# Altium PCB F1956.PcbDoc
Units mm, origin at the board's own origin, x right, y up, seen from the top; angles counter-clockwise.
Board outline 24.13 x 27.56 mm, 2 copper layers (Top Layer, Bottom Layer), stack 1.27 mm thick; 6 components, 7 nets, 53 pads, 13 vias.
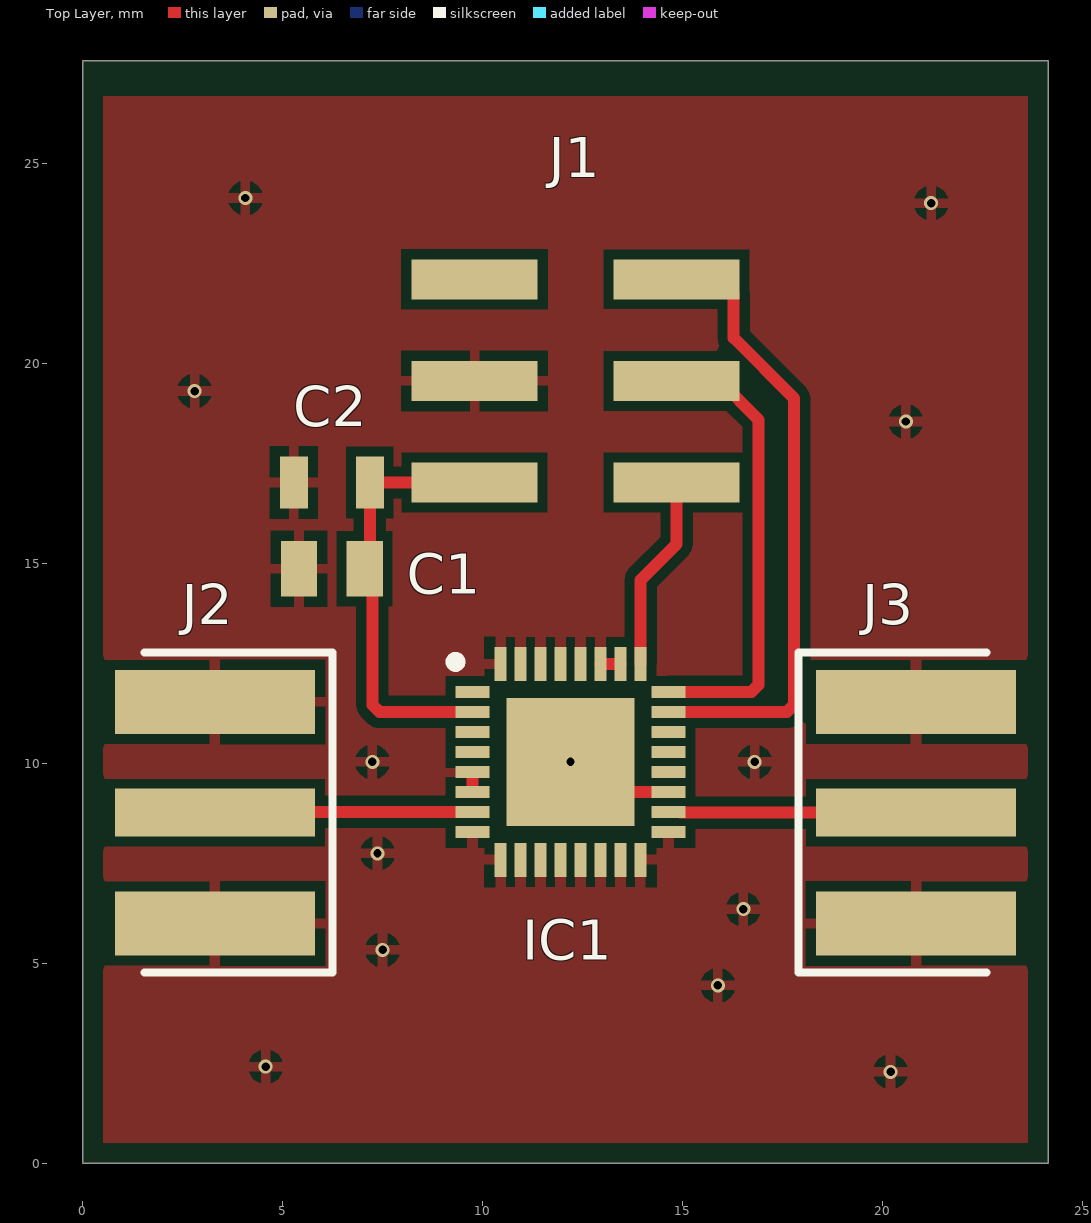
[diagram p0: Top Layer view]
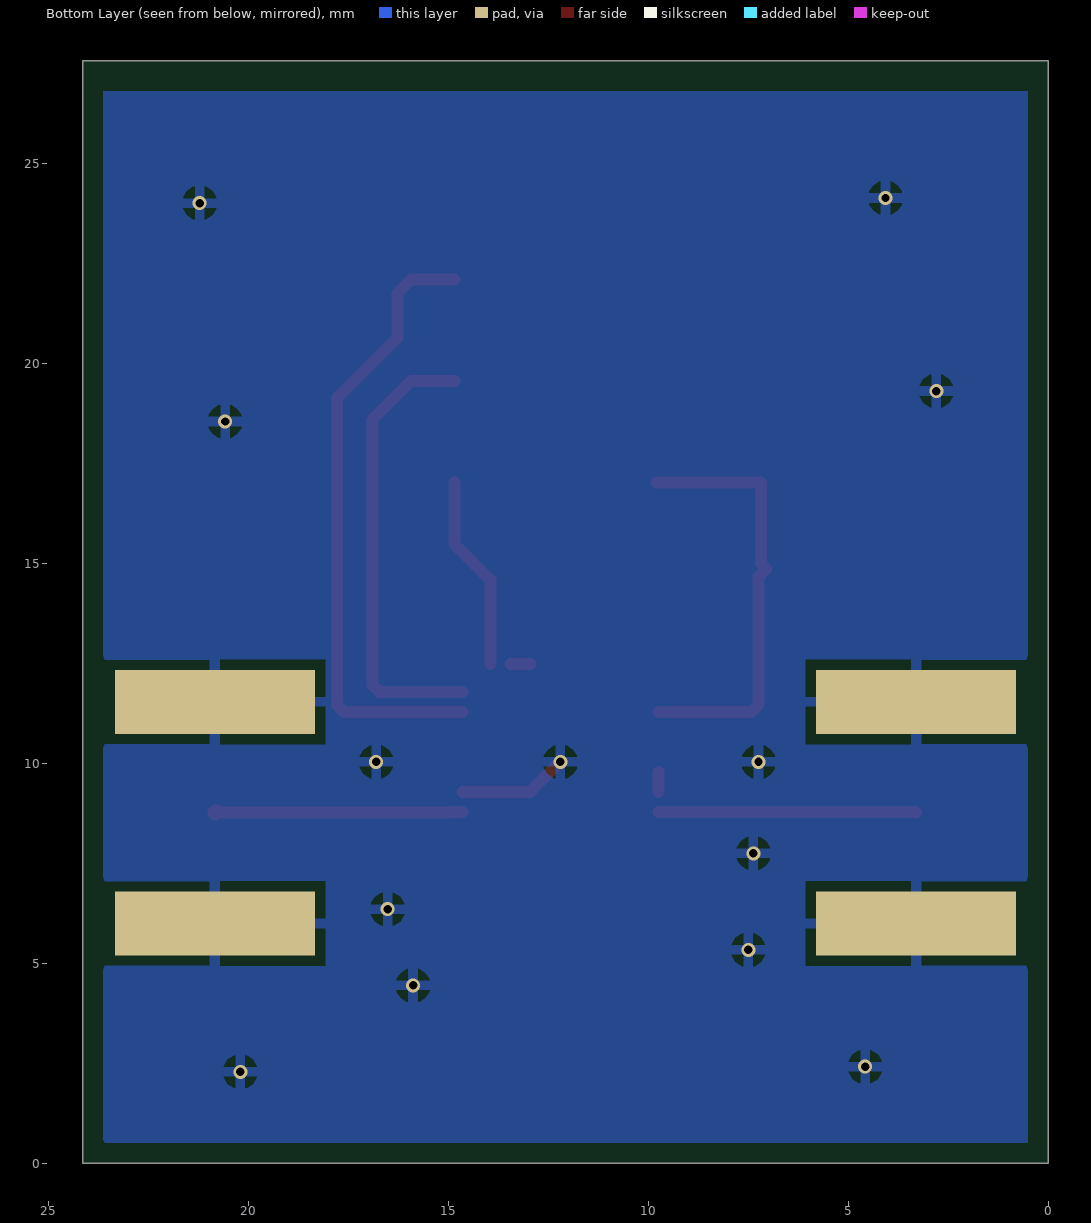
[diagram p1: Bottom Layer view, seen from below]

## Layer stack, top to bottom
Top Solder: solder mask 0.0152, Solder Resist, Dk 3.5
Top Layer: signal copper 0.035
Dielectric 1: dielectric 1.2, FR-4, Dk 4.8
Bottom Layer: signal copper 0.035
Bottom Solder: solder mask 0.0152, Solder Resist, Dk 3.5

## Board outline
0,0 24.13,0 24.13,27.559 0,27.559

## Design rules (kind name [scope] priority, off if disabled: settings)
Clearance [All] p1: gap=0.254 ignorepadtopadclearanceinfootprint=FALSE except(0: Arc-Hole Track-Hole SMDPad-Hole THPad-Hole Via-Hole Fill-Hole Poly-Hole Region-Hole Text-Hole; 0.15: Arc-Arc Arc-Track Arc-SMDPad Track-Track Track-SMDPad SMDPad-SMDPad; 0.5: THPad-THPad)
MinimumSolderMaskSliver [All] p1: minsoldermaskwidth=0.1
PolygonConnect [All] p1: connectstyle=Relief reliefconductorwidth=0.254 reliefentries=4 polygonreliefangle="90 Angle" airgapwidth=0.254
RoutingLayers [All] p1: top layer_v5=TRUE bottom layer_v5=FALSE
RoutingVias [All] p1: holewidth=0.15 width=0.25 viastyle="Through Hole" minholewidth=0.15 minwidth=0.25 maxholewidth=0.2 maxwidth=0.3
SolderMaskExpansion [All] p1: expansion=0.102 istentingtop=FALSE
Width [All] p1: maxlimit=0.9 minlimit=0.15 preferedwidth=0.254 minimp=50.000000 maximp=50.000000 favimp=50.000000
28 further rules are at their usual default settings.

## Classes and differential pairs
component class "PA Attenuator": C1 C2 J2

## Components (designator, comment, footprint, x,y, rotation, side; value= is the part's Value field where it differs from the comment)
C1 "GJ821BR71H105KA12K" CAPC2012X135N 6.223,14.859 r0 top
C2 "GRM21A5C2E102FWA1J" FP-GRM21A-0_2-MFG 6.223,17.018 r0 top
IC1 "F1956NBGI8" QFN50P500X500X80-33N-D 12.192,10.033 r0 top
J1 "M20-8760342R" M208760342R 12.319,19.558 r90 top
J2 "CON-SMA-EDGE-S" FP-CON-SMA-EDGE-S-MFG -3.958,8.763 r90 top
J3 "CON-SMA-EDGE-S" FP-CON-SMA-EDGE-S-MFG 28.088,8.763 r270 top

## Footprints (in the part's own frame and the unit in brackets; to place one, negate y for a bottom-side part, rotate by r counter-clockwise, add the part's x,y. Pads: shape width x height; smd on the part's side, far side on the other; paste and mask are expansions set on the pad)
CAPC2012X135N [mm]
  rect 0.91x1.39 smd: 1(-0.82,0) 2(0.82,0)
FP-CON-SMA-EDGE-S-MFG [mm]
  rect 1.2x5 smd paste+0 mask+0: 1(0,-7.26)
  rect 1.6x5 smd paste+0 mask+0: 2(-2.77,-7.26) 3(2.77,-7.26)
  rect 1.6x5 smd far side paste+0 mask+0: 4(-2.77,-7.26) 5(2.77,-7.26)
  silkscreen extent -4,-10.2 4,-5.5
FP-GRM21A-0_2-MFG [mm]
  rect 0.7x1.3 smd paste+0 mask+0: 1(-0.95,0) 2(0.95,0)
  body extent -1.4,-0.82 1.4,0.82, height 0.25
M208760342R [mm]
  rect 1x3.15 smd: 1(-2.54,-2.525) 2(-2.54,2.525) 3(0,-2.525) 4(0,2.525) 5(2.54,-2.525) 6(2.54,2.525)
QFN50P500X500X80-33N-D [mm]
  rect 0.85x0.3 smd: 1(-2.45,1.75) 2(-2.45,1.25) 3(-2.45,0.75) 4(-2.45,0.25) 5(-2.45,-0.25) 6(-2.45,-0.75) 7(-2.45,-1.25) 8(-2.45,-1.75) 17(2.45,-1.75) 18(2.45,-1.25) 19(2.45,-0.75) 20(2.45,-0.25) 21(2.45,0.25) 22(2.45,0.75) 23(2.45,1.25) 24(2.45,1.75)
  rect 0.3x0.85 smd: 9(-1.75,-2.45) 10(-1.25,-2.45) 11(-0.75,-2.45) 12(-0.25,-2.45) 13(0.25,-2.45) 14(0.75,-2.45) 15(1.25,-2.45) 16(1.75,-2.45) 25(1.75,2.45) 26(1.25,2.45) 27(0.75,2.45) 28(0.25,2.45) 29(-0.25,2.45) 30(-0.75,2.45) 31(-1.25,2.45) 32(-1.75,2.45)
  rect 3.2x3.2 smd: 33(0,0)
  silkscreen extent -3,2.38 -2.75,2.62

## Part data
C1: "Capacitor", Manufacturer_Name="Murata Electronics", Mouser Part Number=81-GJ821BR71H105KA2K, Datasheet Link=https://www.mouser.it/datasheet/2/281/GJ821BR71H105KA12-01-1633769.pdf, Height=1.35mm, Manufacturer_Part_Number=GJ821BR71H105KA12K, Mouser Price/Stock=https://www.mouser.co.uk/ProductDetail/Murata-Electronics/GJ821BR71H105KA12K?qs=QzBtWTOodeUPH%252BEtzhwB2g%3D%3D
C2: library part CMP-06035-012030-1, "Chip Multilayer Ceramic Capacitors for General Purpose, 0805, 1000pF, C0G, 30ppm/°C, 1%, 250V"
IC1: "Integrated Circuit", Manufacturer_Name="Renesas Electronics", Mouser Part Number=972-F1956NBGI8, Datasheet Link=https://www.idt.com/document/dst/f1956-datasheet-rev02, Height=0.8mm, Manufacturer_Part_Number=F1956NBGI8, Mouser Price/Stock=https://www.mouser.co.uk/ProductDetail/Renesas-Electronics/F1956NBGI8?qs=QilpELpYHq9OafJ8HDkRsg%3D%3D
J1: "Connector", Manufacturer_Name=Harwin, Mouser Part Number=855-M20-8760342R, Datasheet Link=https://cdn.harwin.com/pdfs/M20-876R.pdf, Height=11.5mm, Manufacturer_Part_Number=M20-8760342R, Mouser Price/Stock=https://www.mouser.co.uk/ProductDetail/Harwin/M20-8760342R?qs=vF78I%252BjhbY%2F5VOL01aBOqA%3D%3D
J2 J3: library part CMP-204357-000001-1, "CONN SMA JACK STR EDGE MNT", Frequency=18GHz, Manufacturer="RF Solutions Ltd.", Package=CONN_JACK, Automotive=No, Category=Conn, ComponentLink2Description=Datasheet, ComponentLink2URL=https://www.rfsolutions.co.uk/downloads/1498648656DS-CON-EDGE-SMA-4.pdf, Conn Orientation="Right Angle", Contact Material=Gold, Device Class L1=Connectors, Device Class L2="RF / Coaxial Connectors", Device Class L3=unset, Digikey Description="CONN SMA JACK STR EDGE MNT", Footprint Url=https://forum.upverter.com/uploads/default/original/3X/b/e/be75b907af57498775929d6d9099689c472e0307.pdf, Height=6.35mm, Impedance=50Ω, Is Female=yes, Lead Free=Yes, Manufacturer Part Number=CON-SMA-EDGE-S, Number Of Contacts=1, Octopart=https://octopart.com/con-sma-edge-s-rf+solutions-70967450, RoHS=TRUE, Shielding=true

## Via types
v1: diameter 0.35, hole 0.21, Top Layer to Bottom Layer, 13 vias

## Nets (pads, with @x,y where several pads share a name; then routed paths per layer and width w, separated by ;. In a path a pad name is that pad's centre, name@x,y a point inside that pad or via, vN(x,y) a via of type N, cw(c..) or ccw(c..) an arc to the next point about the centre after c; other vN are vias at no path point)
GND: C1.1 C2.1 IC1.5 IC1.6 IC1.8 IC1.9 IC1.10 IC1.11 IC1.12 IC1.13 IC1.14 IC1.15 IC1.16 IC1.17 IC1.19 IC1.26 IC1.27 IC1.28 IC1.29 IC1.30 IC1.31 IC1.32 IC1.33 J1.4 J2.2 J2.3 J2.4 J2.5 J3.2 J3.3 J3.4 J3.5 | length 3.8
  Top Layer w0.3: IC1.6 IC1.5 ; v1(12.192,10.033) 12.942,9.283 IC1.19 ; IC1.27 IC1.26
  other v1: 20.193,2.286 4.572,2.413 15.875,4.445 7.493,5.334 16.51,6.35 7.366,7.747 7.239,10.033 16.795,10.033 20.574,18.542 2.794,19.304 21.209,24.003 4.064,24.13
NetIC1_7: IC1.7 J2.1 | length 6.4
  Top Layer w0.3: J2.1 3.322,8.783 IC1.7
NetIC1_18: IC1.18 J3.1 | length 6.2
  Top Layer w0.3: IC1.18 14.917,8.783 14.937,8.763 J3.1
  Top Layer w0.381: J3.1@20.808,8.783 J3.1
SPI_CLK: IC1.24 J1.3 | length 11.4
  Top Layer w0.3: IC1.24 16.715,11.783 16.891,11.959 16.891,18.586 15.919,19.558 J1.3
SPI_DATA: IC1.25 J1.1 | length 4.9
  Top Layer w0.3: IC1.25 13.942,14.577 14.844,15.479 J1.1
SPI_LE: IC1.23 J1.5 | length 15.7
  Top Layer w0.3: IC1.23 17.604,11.283 17.78,11.459 17.78,19.121 16.269,20.632 16.269,21.748 15.919,22.098 J1.5
VDD: C1.2 C2.2 IC1.2 J1.2 | length 10.9
  Top Layer w0.3: IC1.2 7.415,11.283 7.239,11.459 7.239,14.663 C1.2 7.173,14.989 C2.2 J1.2
pads on no net: IC1.1 IC1.3 IC1.4 IC1.20 IC1.21 IC1.22 J1.6

## Polygon pours and split planes (outlines as drawn)
GND on Bottom Layer "NONET_L-01_P-001" (solid, pour order 0): 0.508,26.797 23.622,26.797 23.622,0.635 23.749,0.508 0.508,0.508
GND on Top Layer "NONET_L-01_P-001" (solid, pour order 1): 0.508,26.67 23.622,26.67 23.622,0.508 0.508,0.508

## Silkscreen, mask and mechanical layers (free items; w line width, h text height)
Mechanical 1:
  lines w0.254: 0.635,27.305 23.876,27.305 23.876,0.254 0.254,0.254 0.254,27.305 1.016,27.305